# Altium PCB Current_Control.PcbDoc
Units mil, origin at the board's own origin, x right, y up, seen from the top; angles counter-clockwise.
Board outline 780 x 1540 mil, 2 copper layers (Top Layer, Bottom Layer); 5 components, 46 nets, 11 pads, 5 vias.
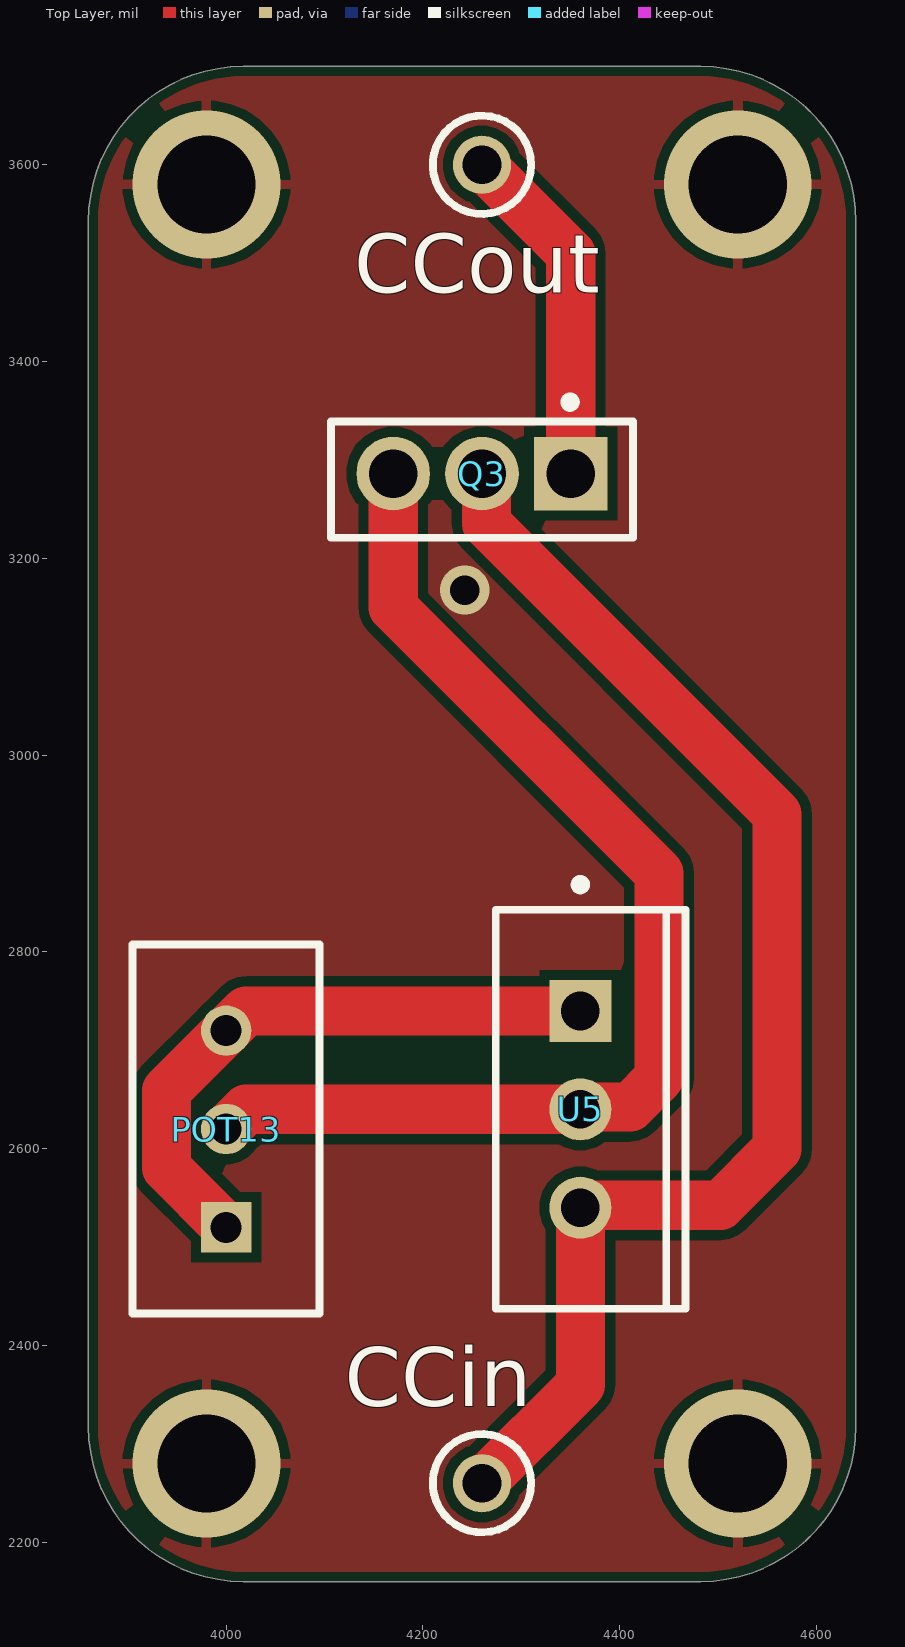
[diagram p0: Top Layer view]
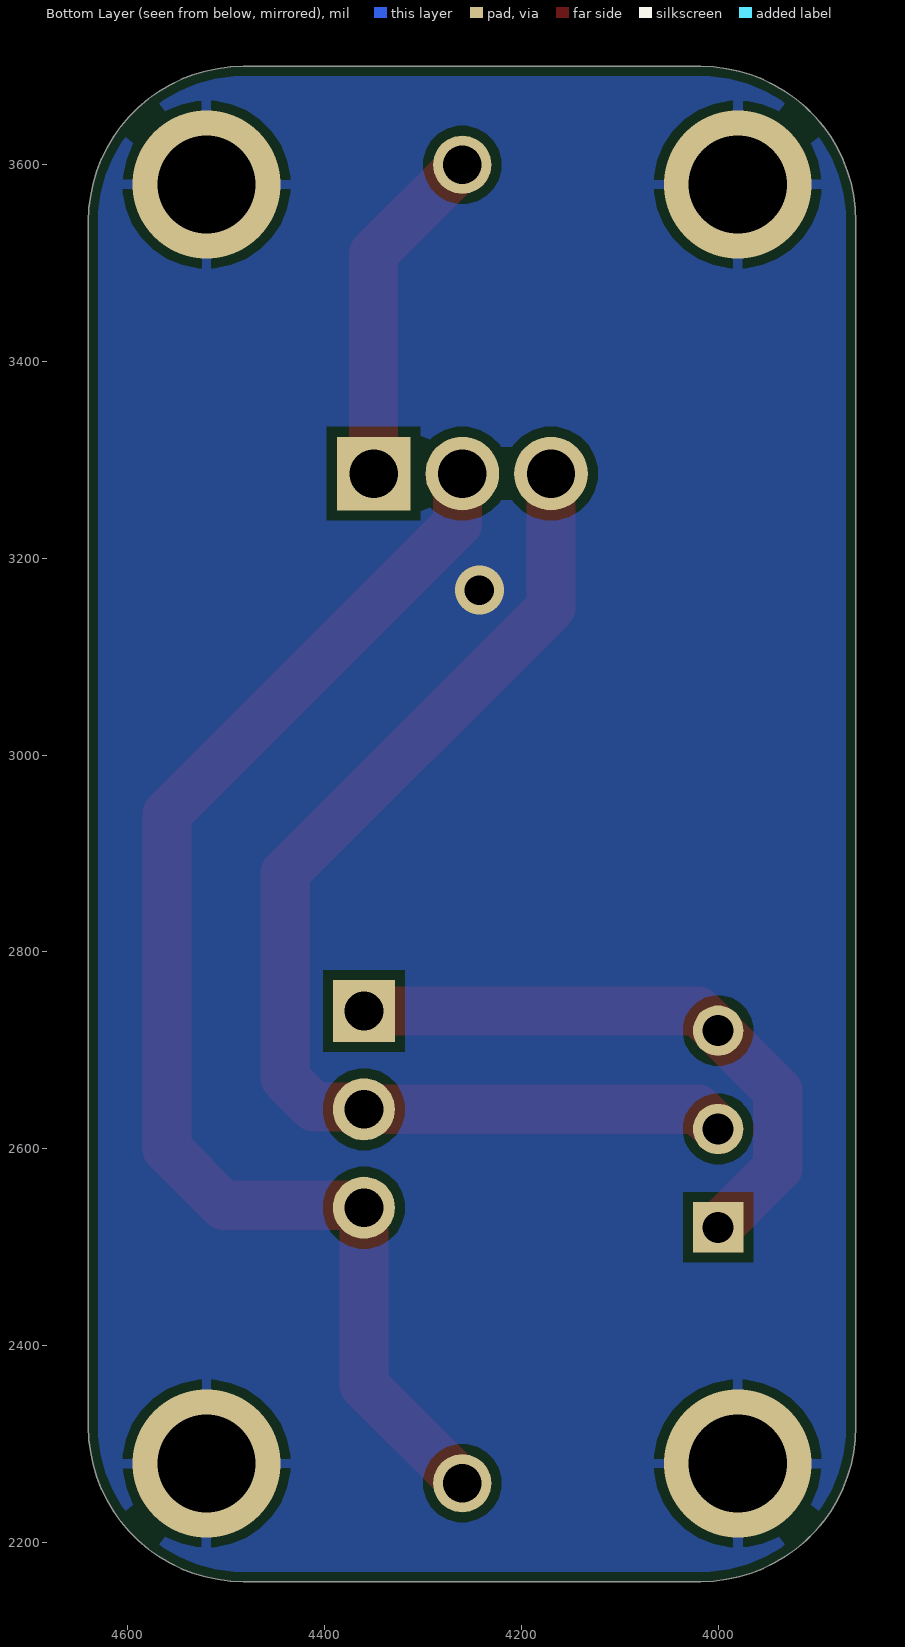
[diagram p1: Bottom Layer view, seen from below]

## Layer stack, top to bottom
Top Solder: solder mask 0.4, Solder Resist, Dk 3.5
Top Layer: signal copper 1.4
Dielectric 1: dielectric 12.6, FR-4, Dk 4.8
Bottom Layer: signal copper 1.4
Bottom Solder: solder mask 0.4, Solder Resist, Dk 3.5

## Board outline
3860,2317.48 3860,3542.52 cw(c4017.48,3542.52) 4017.48,3700 4482.52,3700 cw(c4482.52,3542.52) 4640,3542.52 4640,2317.48 cw(c4482.52,2317.48) 4482.52,2160 4017.48,2160 cw(c4017.48,2317.48)

## Design rules (kind name [scope] priority, off if disabled: settings)
BoardOutlineClearance [All] p1: gap=10 ignorepadtopadclearanceinfootprint=FALSE except(0: Arc-SplitContinuation Track-SplitContinuation SMDPad-SplitContinuation THPad-SplitContinuation Via-SplitContinuation Fill-SplitContinuation Poly-SplitContinuation Region-SplitContinuation Text-SplitContinuation)
Clearance [All] p1: gap=10 ignorepadtopadclearanceinfootprint=FALSE
PolygonConnect [All] p1: connectstyle=Relief reliefconductorwidth=10 reliefentries=4 polygonreliefangle="90 Angle" airgapwidth=10
RoutingVias [All] p1: holewidth=28 width=50 viastyle="Through Hole" minholewidth=28 minwidth=50 maxholewidth=28 maxwidth=50
SolderMaskExpansion [All] p1: expansion=4 istentingtop=FALSE
SupplyNets "Schematic Supply Nets_3" [InNet('+5V')] p1: voltage=0.000
SupplyNets "Schematic Supply Nets_2" [InNet('+30V')] p2: voltage=0.000
SupplyNets "Schematic Supply Nets_1" [InNet('+9V')] p3: voltage=0.000
SupplyNets "Schematic Supply Nets" [InNet('GND')] p4: voltage=0.000
Width [All] p1: maxlimit=100 minlimit=10 preferedwidth=50 minimp=50.000000 maximp=50.000000 favimp=50.000000
30 further rules are at their usual default settings.

## Classes and differential pairs
component class U_Small_Power: BR1 C4 C6 U3
component class U_Power: 30V *1 C5
component class U_Current_Limit: POT13 Q3 U5
component class Control_Board_Schematic: L1 N1

## Components (designator, comment, footprint, x,y, rotation, side; value= is the part's Value field where it differs from the comment)
CCin "5003" KSTN-5003 4260,2260 r90 top
CCout "5003" KSTN-5003 4260,3600 r90 top
POT13 "3296W-1-102LF" BOUR-3296W-1-3 4000,2620 r90 top
Q3 "BD139G" FP-77-09-MFG 4260,3280 r270 top
U5 "LM317TG" ONSC-TO-220-3-221AB-01 4360,2640 r0 top

## Footprints (in the part's own frame and the unit in brackets; to place one, negate y for a bottom-side part, rotate by r counter-clockwise, add the part's x,y. Pads: shape width x height; smd on the part's side, far side on the other; paste and mask are expansions set on the pad)
BOUR-3296W-1-3 [mm] "THD, 3-Leads, Body 9.53x4.83mm, Pitch 2.54mm"
  rect 1.3x1.3 hole 0.8: 1(-2.54,0)
  round 1.3 hole 0.8: 2(0,0) 3(2.54,0)
  silkscreen extent -4.76,-2.41 4.76,2.42, body extent -4.76,-2.41 4.76,2.42, height 11.55
FP-77-09-MFG [mm]
  rect 1.9x1.9 hole 1.25 paste-2539.97 mask+0: 1(-0.155,2.29)
  round 1.9 hole 1.25 paste-2539.97 mask+0: 2(-0.155,0) 3(-0.155,-2.29)
  silkscreen extent -2.12,-3.9 1.5,3.9, body extent -1.6,-4 1.6,4, height 0.25
KSTN-5003 [mm] "Test Point, Through Hole, Dia 2.54mm"
  round 1.5 hole 1: 1(0,0)
  silkscreen extent -1.27,-1.27 1.27,1.27, body extent -1.27,-1.27 1.27,1.27, height 4.57
ONSC-TO-220-3-221AB-01 [mm] "FM, 3-Leads, Body 10.3x4.85mm, Pitch 2.54mm"
  rect 1.6x1.6 hole 1: 1(0,2.54)
  round 1.6 hole 1: 2(0,0) 3(0,-2.54)
  silkscreen extent -2.18,-5.15 2.72,5.92, body extent -2.16,-5.15 2.69,5.15, height 19.68

## Part data
CCin CCout: library part CMP-002-00037-2, "Test Point, Orange, Height 4.6 mm, Tail Length 3 mm, 1-Pin THD, RoHS", Colour=Orange, Manufacturer=Keystone, Package Description="1-Pin Through Hole Device, Dia 2.54 mm", Package Quantity=10, Case/Package=5003, Connector Type=TestPoint, Contact Material=Bronze, Contact Plating=Tin, Datasheet URL=http://keyelco.com/userAssets/file/M65p56.pdf, Datasheet Version=Jun-15, Diameter=2.54mm, Manufacturer URL=http://www.keyelco.com/, Mounting Technology=TH, Package Reference=5003, Packaging=Bulk, Pins=1, RoHS Compliant=True
POT13: library part CMP-009-00037-2, "Square Trimpot(R) Trimming Potentiometer, 1000 Ohm, -55 to 125 degC, 3-Pin THD, RoHS, Tube", Case/Package=3296W-1-3, Manufacturer=Bourns, Max Operating Temperature=150°C, Min Operating Temperature=-55°C, Package Description="3-Pin Through Hole Device, Body 9.53 x 4.83 mm, Pitch 2.54 mm", Package Quantity=50, Power=500mW, Resistance=1k, Tolerance=10%, Voltage Rating=300V, Composition=Potentiometer, Datasheet URL=http://www.bourns.com/docs/Product-Datasheets/3296.pdf, Datasheet Version=May-16, Manufacturer URL=http://www.bourns.com/, Mounting Technology=TH, Package Reference=3296W-1-3, Packaging=Rail/Tube, RoHS Compliant=True
Q3: library part CMP-013-00035-1, "1.5 A, 80 V NPN Power Bipolar Junction Transistor. ONSSPCTRNSTLT1T0R;", Case/Package=TO-225, Max Operating Temperature=150°C, Min Operating Temperature=-55°C, Mounting Technology="Through Hole", Pins=3
U5: library part CMP-019-00023-3, "Adjustable Output, Positive Voltage Regulator, 1.5 A, 0 to 125 degC, 3-Pin TO-220 (221AB-01), Pb-Free, Rail", Case/Package=TO-220, Manufacturer="ON Semiconductor", Max Input Voltage=40V, Max Operating Temperature=125°C, Max Ouput Current=1.5A, Min Input Voltage=4.2V, Min Operating Temperature=0°C, Output Voltage=1.2V, Package Description="3-Pin Flange Mount, Vertical Straight Lead, Body 9.97 x 4.445 mm, Pitch 2.54 mm", Package Quantity=50, Package Reference=TO-220-3-221AB-01, Package Version="Rev. A, 11/2010", Datasheet URL=http://www.onsemi.com/pub_link/Collateral/LM317-D.PDF, Datasheet Version="Rev. 14, 01/2016", Manufacturer URL=http://www.onsemi.com/, Mounting Technology=TH, Output Current=1.5A, Outputs=1, Packaging=Rail/Tube, Pins=3, RoHS Compliant=True

## Via types
v1: diameter 150, hole 100, Top Layer to Bottom Layer, 4 vias
v2: diameter 50, hole 30, Top Layer to Bottom Layer, tented both sides, 1 vias

## Nets (pads, with @x,y where several pads share a name; then routed paths per layer and width w, separated by ;. In a path a pad name is that pad's centre, name@x,y a point inside that pad or via, vN(x,y) a via of type N, cw(c..) or ccw(c..) an arc to the next point about the centre after c; other vN are vias at no path point)
1DQ: 
2DQ: 
+5V: 
+9V: 
+30V: CCin.1 Q3.2 U5.3 | length 1356.6
  Top Layer w50: CCin.1 4360,2360 U5.3 4362.49,2542.49 4502.49,2542.49 4560,2600 4560,2940 4264.75,3235.25 4264.75,3281.36 Q3.2
"Ain+/timer out": 
"CC/NoCC base": 
GND: 
  other v1: 3980,2280 4520,2280 3980,3580 4520,3580
  other v2: 4242.53,3167.7
LSbase: 
Net1_1: 
Net1_2: 
Net1_6: 
Net1_7: 
Net1_8: 
Net1_9: 
Net1_13: 
Net1_14: 
Net30V2_1: 
Net*1_2: 
Net*1_3: 
NetBR1_1: 
NetBR1_4: 
NetC1_1: 
NetCC_1: CCout.1 Q3.1 | length 351.2
  Top Layer w50: CCout.1 4350.16,3509.84 Q3.1
NetD1_1: 
NetD4_2: 
NetD5_2: 
NetD6_2: 
NetD7_1: 
NetD7_2: 
NetJ1_2: 
NetK2_1: 
NetK2_3: 
"NetLEDs +_1": 
NetPOT13_1: POT13.1 POT13.3 U5.1 | length 618.5
  Top Layer w50: POT13.1 3939.41,2580.59 3939.41,2659.09 4000,2719.68 POT13.3 4000.32,2720 4020.32,2740 U5.1
NetPOT13_2: POT13.2 Q3.3 U5.2 | length 1187.7
  Top Layer w50: POT13.2 4000.32,2620 4020.32,2640 U5.2 4362.49,2642.49 4410.71,2642.49 4440,2671.78 4440,2880 4169.84,3150.16 Q3.3
NetQ1_3: 
NetQ4_2: 
NetQ5_2: 
NetQ6_2: 
NetR9_1: 
NetR10_1: 
NetR12_1: 
NetR21_2: 
ThermRef: 
THR-DIS: 

## Polygon pours and split planes (outlines as drawn)
GND on Bottom Layer "NONET_L-01_P-001" (solid, remove dead copper, pour order 1): 3791.95,3733.38 3791.95,2133.38 4671.95,2133.38 4671.95,3733.38
GND on Top Layer "NONET_L-01_P-001" (solid, remove dead copper, pour order 0): 3791.95,3733.38 3791.95,2133.38 4671.95,2133.38 4671.95,3733.38

## Silkscreen, mask and mechanical layers (free items; w line width, h text height)
Mechanical 1:
  the board outline again, w10